# Altium PCB ADV7513.PcbDoc
Units mil, origin at the board's own origin, x right, y up, seen from the top; angles counter-clockwise.
Board outline 1436.53 x 1983.15 mil, 2 copper layers (Top Layer, Bottom Layer), stack 12.8 mil thick; 47 components, 79 nets, 332 pads, 138 vias.
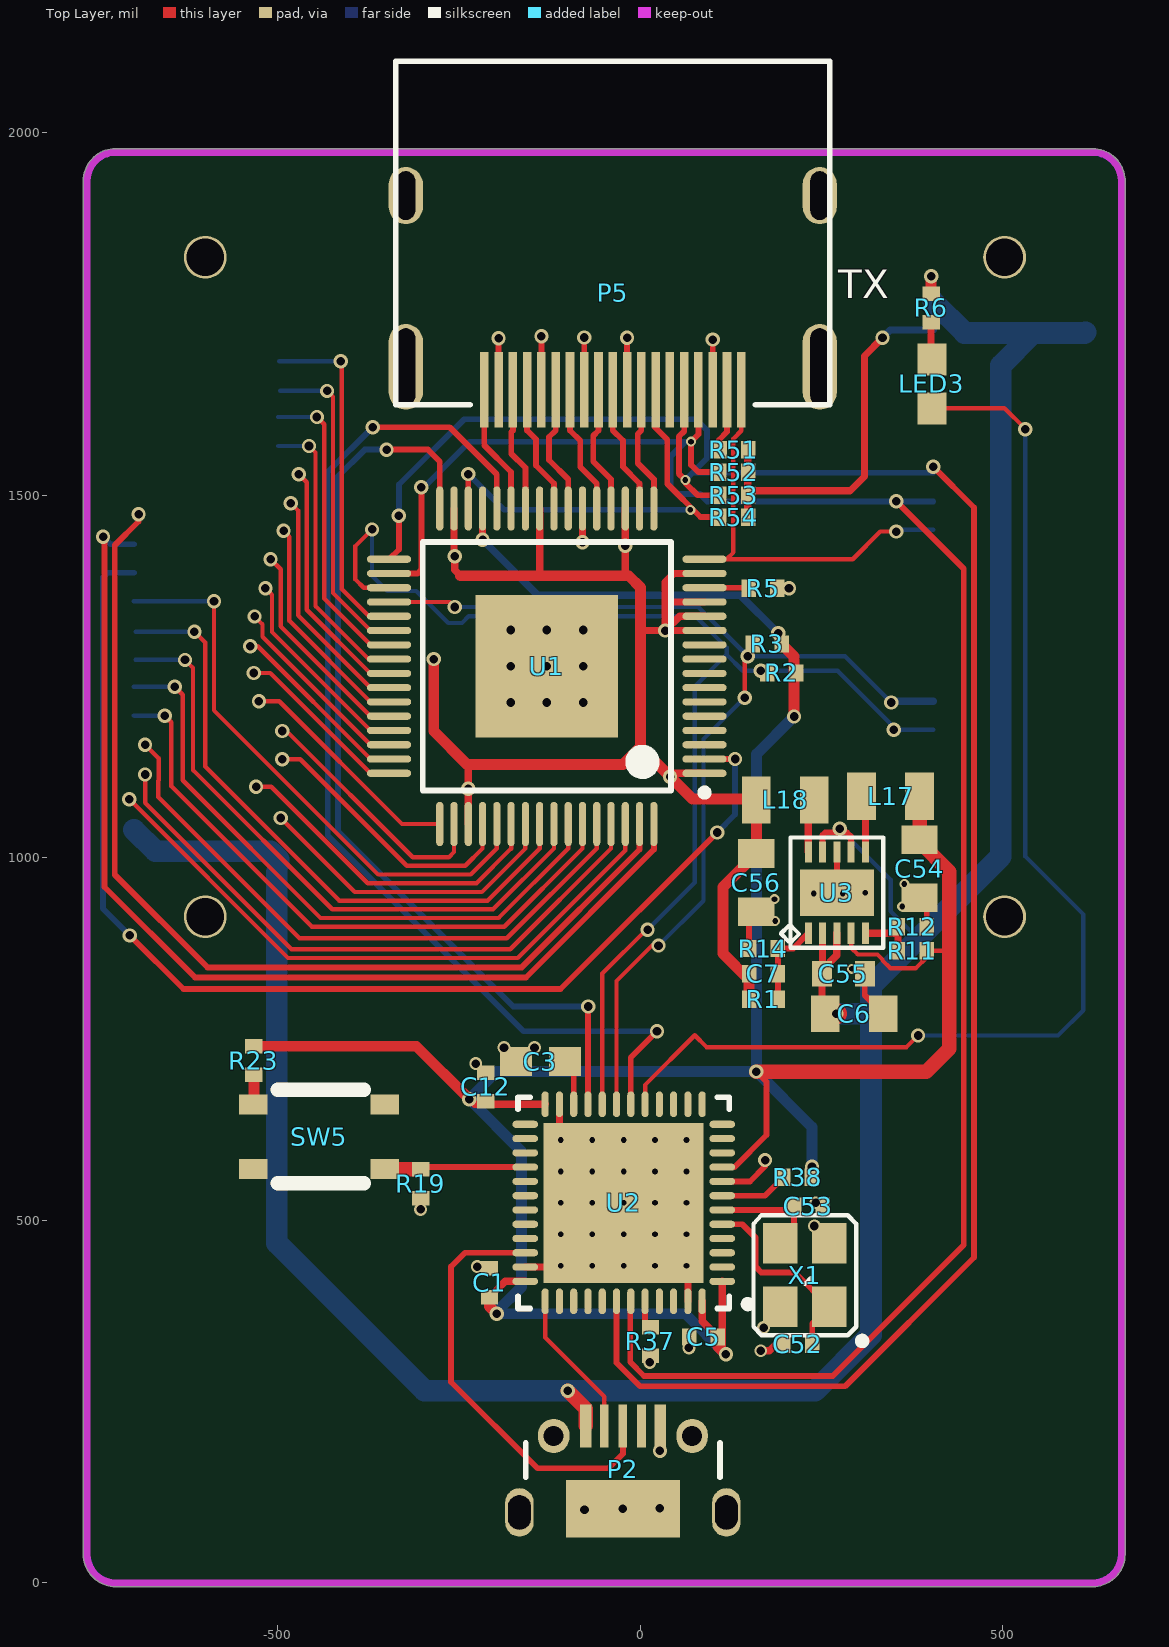
[diagram p0: Top Layer view]
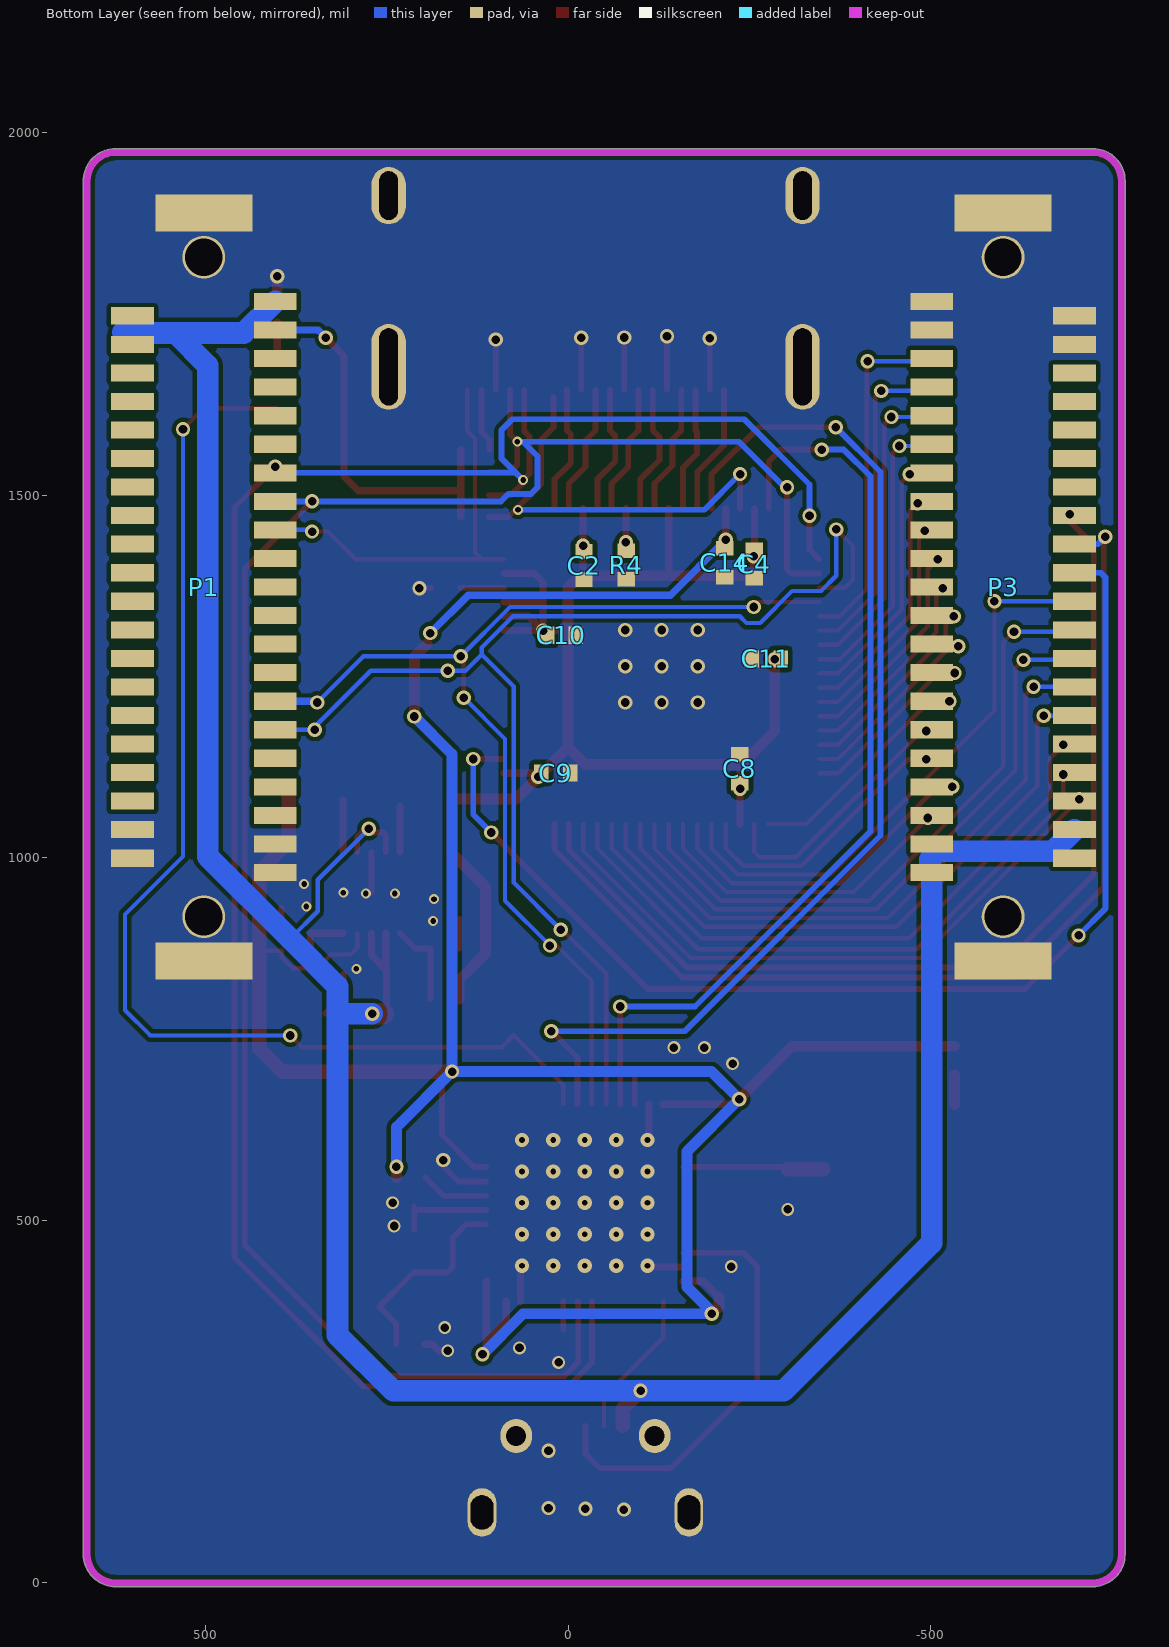
[diagram p1: Bottom Layer view, seen from below]

## Layer stack, top to bottom
Top Solder: solder mask 0.4, Solder Resist, Dk 3.5
Top Layer: signal copper 1.4
Dielectric 1: core 10, FR-4, Dk 4.2
Bottom Layer: signal copper 1.4
Bottom Solder: solder mask 0.4, Solder Resist, Dk 3.5

## Board outline
-768.11,39.37 ccw(c-723.72,39.37) -723.72,-5.02 ccw(c-723.72,0) -723.69,-5.01 624.04,-5.01 624.04,-5.02 ccw(c624.04,39.37) 668.43,39.37 ccw(c663.41,39.37) 668.43,39.4 668.43,1937.01 ccw(c663.41,1937.01) 668.16,1938.63 ccw(c624.04,1933.75) 624.04,1978.13 ccw(c624.04,1973.12) 623.97,1978.13 -723.72,1978.13 ccw(c-723.72,1933.75) -768.11,1933.75 ccw(c-763.09,1933.75) -768.11,1933.72

## Design rules (kind name [scope] priority, off if disabled: settings)
Clearance Clearance_1 [(InNamedPolygon('Bottom Layer-No Net')) vs Not InNet('GND')] p1: gap=15 ignorepadtopadclearanceinfootprint=FALSE except(0: Arc-Hole Track-Hole SMDPad-Hole THPad-Hole Via-Hole Fill-Hole Poly-Hole Region-Hole Text-Hole)
Clearance [All] p2: gap=6 ignorepadtopadclearanceinfootprint=FALSE except(0: Arc-Hole Track-Hole SMDPad-Hole THPad-Hole Via-Hole Fill-Hole Poly-Hole Region-Hole Text-Hole)
DiffPairsRouting [All] p1: maxlimit=10 minlimit=10 mostfreqgap=10 toplayer_minwidth=5.98 toplayer_maxwidth=15 toplayer_prefwidth=15 bottomlayer_minwidth=5.98 bottomlayer_maxwidth=15 bottomlayer_prefwidth=15 maxuncoupledlength=500
MinimumSolderMaskSliver [All] p1 off: minsoldermaskwidth=10
PlaneClearance [All] p1: clearance=10
PlaneConnect [All] p1: planeconnectstyle=Direct reliefexpansion=20 reliefentries=4 reliefconductorwidth=10 reliefairgap=10
PolygonConnect [All] p1: connectstyle=Direct reliefconductorwidth=10 reliefentries=4 polygonreliefangle="90 Angle" airgapwidth=10
RoomDefinition HDMI [InComponentClass('HDMI')] p1 off: confinementstyle=ConfineIn formatcopy=TRUE lockcomponents=FALSE outline 713,51.28 2211,51.28 2211,646.28 713,646.28
RoomDefinition interface [InComponentClass('interface')] p2 off: confinementstyle=ConfineIn formatcopy=TRUE lockcomponents=FALSE outline -6288,-2905.72 -4288,-2905.72 -4288,-1905.72 -6288,-1905.72
RoomDefinition MCU [InComponentClass('MCU')] p3 off: confinementstyle=ConfineIn formatcopy=TRUE lockcomponents=FALSE outline -1278,234.28 1067,234.28 1067,474.28 -1278,474.28
RoutingVias [All] p1: holewidth=12 width=20 viastyle="Through Hole" minholewidth=11.81 minwidth=19.68 maxholewidth=28 maxwidth=50
SilkToBoardRegionClearance [All] p1 off:
SilkToSilkClearance [All] p1 off: silktosilkclearance=10
SilkToSolderMaskClearance [IsPad] p1 off: minsilkscreentomaskgap=10 clearancetoexposedcopper=TRUE
SolderMaskExpansion [All] p1: expansion=4
Width [All] p1: maxlimit=60 minlimit=6 preferedwidth=6
23 further rules are at their usual default settings.

## Classes and differential pairs
component class MCU: C1 C3 C5 C6 C7 C12 C52 C53 C54 C55 C56 L17 L18 LED3 P2 R5 R6 R11 R12 R14 R19 R23 R28 R37 R38 SW5 U2 U3 X1
component class interface: P1 P3
component class HDMI: C2 C4 C8 C9 C10 C11 C14 P5 R2 R3 R4 R5 R51 R52 R53 R54 U1
net class TMDS: TMDS_CLK_N TMDS_CLK_P TMDS_D0_N TMDS_D0_P TMDS_D1_N TMDS_D1_P TMDS_D2_N TMDS_D2_P
differential pair TMDS_CLK: +TMDS_CLK_P -TMDS_CLK_N
differential pair TMDS_D0: +TMDS_D0_P -TMDS_D0_N
differential pair TMDS_D1: +TMDS_D1_P -TMDS_D1_N
differential pair TMDS_D2: +TMDS_D2_P -TMDS_D2_N

## Components (designator, comment, footprint, x,y, rotation, side; value= is the part's Value field where it differs from the comment)
C1 "Cap" 0402 -208,414.28 r270 top value=0.1uF
C2 "Cap" 0402 -22,1403 r90 bottom value=0.1uF
C3 "Cap" 0603 -138,719 r0 top value=4.7uF
C4 "Cap" 0402 -257,1405 r90 bottom value=0.1uF
C5 "Cap" 0402 87,339.28 r0 top value=0.1uF
C6 "10UF" 0805 295,785 r180 top
C7 "33pF" 0402 170,840 r180 top
C8 "Cap" 0402 -237,1123 r270 bottom value=0.1uF
C9 "Cap" 0402 17,1117 r0 bottom value=0.1uF
C10 "Cap" 0402 9,1307.28 r0 bottom value=0.1uF
C11 "Cap" 0402 -273,1274.28 r180 bottom value=0.1uF
C12 "Cap" 0402 -213,684.28 r270 top value=0.1uF
C14 "Cap" 0402 -216,1407 r90 bottom value=0.1uF
C52 "Cap" 0402 217,329.28 r0 top value=20pF
C53 "Cap" 0402 232,519.28 r180 top value=20pF
C54 "4.7UF" 0805 385,985 r90 top
C55 "33pF" 0603L 280,840 r180 top
C56 "4.7UF" 0805 160,966 r90 top
L17 "2.2UH" 0806 345,1085 r0 top
L18 "2.2uH" 0806 200,1080 r180 top
LED3 "LED0" 0603 402,1653.28 r90 top
P1 "DF9-41S" DF9-41S 502.36,1373.55 r270 bottom
P2 "SWD_MicroUSB" MICRO-YZX -24,-13.72 r0 top
P3 "DF9-41S" DF9-41S -600,1373.55 r90 bottom
P5 "HDMI" HDMI-A -38,1626 r180 top
R1 "300k" 0402 170,805 r180 top
R2 "10k" 0402 195,1255 r180 top value=0Ohm
R3 "10k" 0402 175,1295 r180 top value=0Ohm
R4 "10k" 0402 -80,1404 r270 bottom value=0Ohm
R5 "10k" 0402 169,1372 r0 top value=0Ohm
R6 "10k" 0402 401,1758.28 r90 top value=0Ohm
R11 "180k" 0402 375,872 r0 top
R12 "180k" 0402 375,905 r0 top
R14 "68k" 0402 170,875 r180 top
R19 "10k" 0402 -303,550.28 r90 top value=0Ohm
R23 "1k" 0402 -533,720.28 r90 top value=0Ohm
R37 "Res2" 0402 14,333.28 r270 top value=10k
R38 "Res2" 0402 217,559.28 r180 top value=10k
R51 "NC/1k" 0402 129,1563 r0 top value=0Ohm
R52 "NC" 0402 129,1532 r180 top value=0Ohm
R53 "NC" 0402 129,1500 r180 top value=0Ohm
R54 "NC" 0402 129,1470 r180 top value=0Ohm
SW5 "SW-PB" SW3x4 -443,615.28 r180 top
U1 "ADV7513" ADV7611 -129,1264.28 r180 top
U2 "STM32F401CCU6" STM-UFQFPN48_N -23,524.28 r180 top
U3 "Tps62410" DFN-10P-3X3 271,953 r90 top
X1 "24.000 KHz 3.2x2.5mm 8-10pf" OSCILLATOR-3.2X2.5 227,424.28 r90 top

## Footprints (in the part's own frame and the unit in brackets; to place one, negate y for a bottom-side part, rotate by r counter-clockwise, add the part's x,y. Pads: shape width x height; smd on the part's side, far side on the other; paste and mask are expansions set on the pad)
0402 [mil] "0402-RES"
  rect 20x24 smd: 1(-19.68,0) 2(20,0)
0603 [mil] "0603-RES"
  rect 44x40 smd: 1(-33.46,0) 2(34,0)
0603L [mm]
  rect 0.7x0.9 smd: 1(-0.75,0) 2(0.75,0)
  body extent -0.8,-0.4 0.8,0.4, height 0.8
0805 [mil]
  rect 39.37x50 smd: 1(-40,0) 2(40,0)
  body extent -50,-30 50,30, height 31
0806 [mm]
  rect 1x1.65 smd: 1(-1.016,0) 2(1.016,0)
  body extent -1,-0.8 1,0.8, height 0.5
ADV7611 [mm] "Thin QFP, 64-Leads, Body 10x10mm, Pitch 0.5mm, IPC High Density"
  rect 5x5 smd: 0(0,0)
  oval 1.55x0.25 smd: 1(-5.525,3.75) 2(-5.525,3.25) 3(-5.525,2.75) 4(-5.525,2.25) 5(-5.525,1.75) 6(-5.525,1.25) 7(-5.525,0.75) 8(-5.525,0.25) 9(-5.525,-0.25) 10(-5.525,-0.75) 11(-5.525,-1.25) 12(-5.525,-1.75) 13(-5.525,-2.25) 14(-5.525,-2.75) 15(-5.525,-3.25) 16(-5.525,-3.75) 33(5.525,-3.75) 34(5.525,-3.25) 35(5.525,-2.75) 36(5.525,-2.25) 37(5.525,-1.75) 38(5.525,-1.25) 39(5.525,-0.75) 40(5.525,-0.25) 41(5.525,0.25) 42(5.525,0.75) 43(5.525,1.25) 44(5.525,1.75) 45(5.525,2.25) 46(5.525,2.75) 47(5.525,3.25) 48(5.525,3.75)
  oval 0.25x1.55 smd: 17(-3.75,-5.525) 18(-3.25,-5.525) 19(-2.75,-5.525) 20(-2.25,-5.525) 21(-1.75,-5.525) 22(-1.25,-5.525) 23(-0.75,-5.525) 24(-0.25,-5.525) 25(0.25,-5.525) 26(0.75,-5.525) 27(1.25,-5.525) 28(1.75,-5.525) 29(2.25,-5.525) 30(2.75,-5.525) 31(3.25,-5.525) 32(3.75,-5.525) 49(3.75,5.525) 50(3.25,5.525) 51(2.75,5.525) 52(2.25,5.525) 53(1.75,5.525) 54(1.25,5.525) 55(0.75,5.525) 56(0.25,5.525) 57(-0.25,5.525) 58(-0.75,5.525) 59(-1.25,5.525) 60(-1.75,5.525) 61(-2.25,5.525) 62(-2.75,5.525) 63(-3.25,5.525) 64(-3.75,5.525)
  silkscreen extent -5.65,-4.35 4.35,4.55, body extent -5,-5 5,5, height 1.6
DF9-41S [mm]
  rect 1.3x3.4 smd: 0(-13.1,0) 0(13.1,0)
  round 1.5 hole 1.3: 0(-11.55,0) 0(11.55,0)
  rect 0.6x1.5 smd: 1(-10,2.5) 2(-9,2.5) 3(-8,2.5) 4(-7,2.5) 5(-6,2.5) 6(-5,2.5) 7(-4,2.5) 8(-3,2.5) 9(-2,2.5) 10(-1,2.5) 11(0,2.5) 12(1,2.5) 13(2,2.5) 14(3,2.5) 15(4,2.5) 16(5,2.5) 17(6,2.5) 18(7,2.5) 19(8,2.5) 20(9,2.5) 21(10,2.5) 22(9.5,-2.5) 23(8.5,-2.5) 24(7.5,-2.5) 25(6.5,-2.5) 26(5.5,-2.5) 27(4.5,-2.5) 28(3.5,-2.5) 29(2.5,-2.5) 30(1.5,-2.5) 31(0.5,-2.5) 32(-0.5,-2.5) 33(-1.5,-2.5) 34(-2.5,-2.5) 35(-3.5,-2.5) 36(-4.5,-2.5) 37(-5.5,-2.5) 38(-6.5,-2.5) 39(-7.5,-2.5) 40(-8.5,-2.5) 41(-9.5,-2.5)
DFN-10P-3X3 [mm]
  rect 0.75x0.25 smd mask+0.064: 1(-1.451,0.999) 2(-1.451,0.499) 3(-1.451,-0.001) 4(-1.451,-0.501) 5(-1.451,-1.001) 6(1.4,-1.001) 7(1.4,-0.501) 8(1.4,-0.001) 9(1.4,0.499) 10(1.4,0.999)
  rect 1.64x2.6 smd: 11(-0.025,-0.001)
  silkscreen extent -1.96,-1.63 1.9,1.95
HDMI-A [mm]
  oval 1.2x3 hole 0.65 slot 2.7 at 90 deg: 0(-7.25,-1.3) 0(7.25,-1.3)
  oval 1.2x2 hole 0.65 slot 1.7 at 90 deg: 0(-7.25,-7.3) 0(7.25,-7.3)
  rect 0.3x2.65 smd: 1(4.5,-0.5) 2(4,-0.5) 3(3.5,-0.5) 4(3,-0.5) 5(2.5,-0.5) 6(2,-0.5) 7(1.5,-0.5) 8(1,-0.5) 9(0.5,-0.5) 10(0,-0.5) 11(-0.5,-0.5) 12(-1,-0.5) 13(-1.5,-0.5) 14(-2,-0.5) 15(-2.5,-0.5) 16(-3,-0.5) 17(-3.5,-0.5) 18(-4,-0.5) 19(-4.5,-0.5)
  silkscreen extent -7.6,-12 7.6,0.03
MICRO-YZX [mm]
  rect 0.4x1.5 smd: 1(-1.3,5.85) 5(1.3,5.85)
  rect 0.3x1.5 smd: 2(-0.65,5.85) 3(0,5.85) 4(0.65,5.85)
  oval 1x1.7 hole 0.8 slot 1.2 at 90 deg: 5(-3.625,2.82) 5(3.625,2.82)
  oval 1.1x1.2 hole 0.7: 5(-2.425,5.5) 5(2.425,5.5)
  rect 4x2 smd: 5(0,2.95)
  silkscreen extent -3.4,4.05 3.4,5.25, body extent -4.02,0.33 3.98,5.93, height 2.6
OSCILLATOR-3.2X2.5 [mil] "OSCILLATOR-3.2X2.5"
  rect 56x48 smd: 1(-43.31,-33.46) 2(44,-33.46) 3(44,34) 4(-43.31,34)
  silkscreen extent -95,-83 83,71
STM-UFQFPN48_N [mm] "QFN, 48-Leads, Body 7.1x7.1mm, Pitch 0.5mm, Thermal Pad 5.6x5.6mm, IPC Medium Density"
  oval 0.9x0.25 smd: 1(-3.45,2.75) 2(-3.45,2.25) 3(-3.45,1.75) 4(-3.45,1.25) 5(-3.45,0.75) 6(-3.45,0.25) 7(-3.45,-0.25) 8(-3.45,-0.75) 9(-3.45,-1.25) 10(-3.45,-1.75) 11(-3.45,-2.25) 12(-3.45,-2.75) 25(3.45,-2.75) 26(3.45,-2.25) 27(3.45,-1.75) 28(3.45,-1.25) 29(3.45,-0.75) 30(3.45,-0.25) 31(3.45,0.25) 32(3.45,0.75) 33(3.45,1.25) 34(3.45,1.75) 35(3.45,2.25) 36(3.45,2.75)
  oval 0.25x0.9 smd: 13(-2.75,-3.45) 14(-2.25,-3.45) 15(-1.75,-3.45) 16(-1.25,-3.45) 17(-0.75,-3.45) 18(-0.25,-3.45) 19(0.25,-3.45) 20(0.75,-3.45) 21(1.25,-3.45) 22(1.75,-3.45) 23(2.25,-3.45) 24(2.75,-3.45) 37(2.75,3.45) 38(2.25,3.45) 39(1.75,3.45) 40(1.25,3.45) 41(0.75,3.45) 42(0.25,3.45) 43(-0.25,3.45) 44(-0.75,3.45) 45(-1.25,3.45) 46(-1.75,3.45) 47(-2.25,3.45) 48(-2.75,3.45)
  rect 5.6x5.6 smd: 49(0,0)
  silkscreen extent -4.48,-3.7 3.7,3.7, body extent -3.55,-3.55 3.55,3.55, height 0.6
SW3x4 [mm]
  rect 1x0.7 smd: 1(-2.3,1.125) 2(2.3,-1.125) 3(2.3,1.125) 4(-2.3,-1.125)
  silkscreen extent -1.58,-1.65 1.45,1.63, body extent -2,-1.5 2,1.5, height 2.6

## Part data
C1 C2 C3 C4 C5 C8 C9 C10 C11 C12 C14 C52 C53: "Capacitor", LatestRevisionDate=17-Jul-2002, LatestRevisionNote="Re-released for DXP Platform.", PackageDescription="Radial Cap, Thru-Hole; 2 Leads; 0.3 in Pin Spacing", PackageReference=RAD-0.3, Published=8-Jun-2000, Publisher="Altium Limited"
C6 C7 C54 C55 C56: library part CAP/0402, 1st Part Field=0402
L17 L18: library part L/2.5*2.0
LED3: "Typical INFRARED GaAs LED", LatestRevisionDate=08-Jul-2005, LatestRevisionNote="Mech Layer 1 removed.", PackageDescription="LED; 2 Leads", PackageReference=LED-0, Published=8-Jun-2000, Publisher="Altium Limited"
P2: "Connector SMD USB Micro Type B middle mount", Manufacturer 1="Molex Inc", Package / Case=SMD, Supplier Part Number 1=WM17142CT-ND, SCDType=undef, Supplier 1=Digi-Key
R1 R11 R12 R14: library part RES/0402_3
R2 R3 R4 R5 R6 R19 R23 R51 R52 R53 R54: library part Res2, "Resistor", LatestRevisionDate=17-Jul-2002, LatestRevisionNote="Re-released for DXP Platform.", PackageDescription="Axial Device, Thru-Hole; 2 Leads; 0.4 in Pin Spacing", PackageReference=AXIAL-0.4, Published=8-Jun-2000, Publisher="Altium Limited"
R37 R38: "Resistor", LatestRevisionDate=17-Jul-2002, LatestRevisionNote="Re-released for DXP Platform.", PackageDescription="Axial Device, Thru-Hole; 2 Leads; 0.4 in Pin Spacing", PackageReference=AXIAL-0.4, Published=8-Jun-2000, Publisher="Altium Limited"
SW5: "Switch", LatestRevisionDate=17-Jul-2002, LatestRevisionNote="Re-released for DXP Platform.", PackageDescription="Switch; 2 Leads", PackageReference=SPST-2, Published=24-Mar-1999, Publisher="Altium Limited"
U2: "ARM Cortex-M4 32-bit MCU+FPU, 105 DMIPS, 256 kB Flash, 64 kB Internal RAM, 36 I/Os, 48-pin UFQFPN, -40 to 85 degC, Tray", I/Os (High Current)=36, Manufacturer=STMicroelectronics, Operating Frequency(F) (Processor speed) (MHz)=84, Supplier Part Number 1=19X6217, Supply Voltage(Vcc) max (V)=3.6, Supply Voltage(Vcc) min (V)=1.8, ComponentLink1Description="Manufacturer URL", ComponentLink1URL=http://www.st.com/web/en/home.html, ComponentLink2Description=Datasheet, ComponentLink2URL=http://www.st.com/st-web-ui/static/active/en/resource/technical/document/data_brief/DM00071938.pdf, ComponentLink3Description="Package Specification", ComponentLink3URL=http://www.st.com/st-web-ui/static/active/en/resource/technical/document/data_brief/DM00071938.pdf, Core="ARM Cortex-M4", DatasheetVersion="Rev. 1", FLASH Size (Prog) (kB)=256, Internal RAM Size (kB)=64, Mounting Technology="Surface Mount", PackageDescription="48-Pin Ultra Thin Fine Pitch Quad Flat No-Lead, 7 x 7 x 0.6 mm Body, 0.5 mm Pitch, Exposed Pad", PackageReference=UFQFPN48, PackageVersion="Rev. 1, 04/2013", Packing=Tray, PartNumber=STM32F401CCU6, Supplier 1=Newark, Supplier 2=Mouser, Supplier Part Number 2=511-STM32F401CCU6
X1: library part OSCILLATOR-3.2X2.5, "Crystal Oscillator in 3.2x2.5 SMD"

## Via types
v1: diameter 19.68, hole 11.81, Top Layer to Bottom Layer, 91 vias
v2: diameter 19.68, hole 7.87, Top Layer to Bottom Layer, 25 vias
v3: diameter 13.78, hole 7.87, Top Layer to Bottom Layer, 11 vias
v4: diameter 17.72, hole 11.81, Top Layer to Bottom Layer, 11 vias

## Nets (pads, with @x,y where several pads share a name; then routed paths per layer and width w, separated by ;. In a path a pad name is that pad's centre, name@x,y a point inside that pad or via, vN(x,y) a via of type N, cw(c..) or ccw(c..) an arc to the next point about the centre after c; other vN are vias at no path point)
1.8D: C2.2 C4.2 C7.2 C8.2 C9.2 C10.2 C11.2 C56.2 L18.2 R1.2 U1.1 U1.11 U1.12 U1.13 U1.15 U1.19 U1.25 U1.31 U1.51 | length 2110.3
  Top Layer w10: U1.31 -256.95,1416.95 v1(-256,1416) -256,1397 -248,1389 ; U1.51 v1(-237.27,1095.27) -237.27,1127.27 ; -138.84,1390.84 U1.25 ; -20.73,1393.73 v1(-20.73,1430.27) U1.19 ; 2.51,1313.49 v1(34.49,1313.49) ; v1@45.64,1116.64 U1.1 ; U1.11 v1(34.49,1313.49) ; U1.12 54.17,1333.17 v1(34.49,1313.49) ; U1.13 38.86,1352.86 34.49,1348.49 ; U1.15 46.23,1392.23 34.49,1380.49 34.49,1348.49 ; v1(34.49,1313.49) 34.49,1348.49
  Top Layer w15: v1(-285,1274.12) -285,1175 -239,1129 -24,1129 0,1153 ; -248,1389 -16,1389 0,1373 0,1153 ; R1.2 150,832 114,868 114,960 C56.2 L18.2 ; L18.2@155,1081.28 71.72,1081.28 v1(41,1112) 0,1153
3.3D: C1.2 C5.2 C12.2 C14.2 C54.2 L17.2 R2.1 R3.1 R11.2 R23.2 R38.1 U1.29 U2.1 U2.9 U2.24 U2.36 U2.48 U3.4 | length 4087.3
  Top Layer w6: U3.4 290.72,876 300,866.72 327.03,866.72 334,859.75 334,858.59 344.59,848 380,848 395,863 R11.2 420,872
  Top Layer w8: U2.9 129.76,573.49 174,617.73 174,691.28 v1(160,705.28)
  Top Layer w10: v1(-236,667.28) -228.83,660.1 U2.24 ; v1(-217.58,1438.58) U1.29 ; C1.2 -186.27,416.01 U2.36 ; U2.48 85.27,361.01 C5.2 ; v1@112.83,320.45 U2.1
  Top Layer w15: R23.2 -309,740.28 v1(-236,667.28) ; C1.2 -208,381.28 v1(-198,371.28) ; C5.2 107,326.28 112.83,320.45 v1(118,315.28) ; R3.1 212,1277.69 v1(212,1195) ; R38.1 v1(236.69,573.96)
  Top Layer w20: v1(160,705.28) 394.28,705.28 426,737 426,981 385,1022 L17.2
  Bottom Layer w10: v1(-217.58,1438.58) -141.31,1362.31 137.69,1362.31 v1(190,1310)
  Bottom Layer w15: v1(118,315.28) 62,371.28 v1(-198,371.28) -198,374.28 -164,408.28 -164,595.28 v1(-236,667.28) -198,705.28 v1(160,705.28) ; v1(212,1195) 160,1143 v1(160,705.28) ; v1(236.69,573.96) 236.69,628.59 v1(160,705.28)
5V: C6.2 C55.2 P1.1 P1.2 P1.40 P1.41 P2.1 P3.1 P3.2 P3.40 P3.41 R51.2 R52.1 R53.1 R54.1 U3.2 U3.3 U3.7 U3.9 | length 4493.5
  Top Layer w8: U3.9 251.35,1031.35 255,1035 v1@275,1035 ; v1(275,1040) v1@275,1035 ; U3.7 290.72,1029.28 285,1035 v1@275,1035
  Top Layer w10: R54.1@148,1470.31 R53.1@148,1506.28 ; R51.2@148,1563 R53.1@148,1506.28 ; U3.2 C55.2@251.35,845.88 ; C6.2 250.47,789.53 250.47,845 C55.2@251.35,845.88 ; U3.3 271.03,865.56 C55.2@251.35,845.88 ; v1(334,1717.28) 309,1692.28 309,1525.96 289,1505.96 288.69,1506.28 R53.1@148,1506.28
  Top Layer w20: v1(-100,265) -75.18,240.18 P2.1
  Top Layer w30: C6.2 v1(270,785)
  Bottom Layer w6: v1(275,1040) 345.11,969.89 345.11,926.42 382.06,889.47 382.06,886.94
  Bottom Layer w10: v1(334,1717.28) 344.61,1727.88 P1.2
  Bottom Layer w30: P3.40 -668.52,1009 -510,1009 -499,998 -499,992 ; P3.1 -501.57,469 -297.57,265 v1(-100,265) 241,265 318,342 318,785 ; v1(270,785) 318,785 ; P1.1 447.19,1724 542,1724 ; 614,1725 613,1724 542,1724 ; 318,785 318,822.88 382.06,886.94 497,1001.88 497,1679 542,1724
GND: C1.1 C2.1 C3.1 C4.1 C5.1 C6.1 C8.1 C9.1 C10.1 C11.1 C12.1 C14.1 C52.1 C53.1 C54.1 C55.1 C56.1 P1.0 P1.20 P1.21 P1.22 P1.23 P2.5 P3.0 P3.20 P3.21 P3.22 P3.23 P5.0 P5.2 P5.5 P5.8 P5.11 P5.17 R4.2 R5.2 R6.2 R12.2 R14.2 R19.1 R37.2 U1.0 U2.8 U2.23 U2.35 U2.47 U2.49 U3.8 U3.11 X1.2 X1.4 | length 840.1
  Top Layer w8: P5.2 v1(-195.48,1716.48) ; P5.5 v1(-136.43,1719.43) ; P5.8 v1(-77.37,1717.63) ; P5.11 v1(-18.31,1717.31) ; P5.17 v1(99.8,1714.8) ; U2.8 151.21,553.8 172,574.59 v1(172,583.28) ; R14.2 C56.1@150,916 ; R5.2 v1(205,1372) ; U3.11 U3.8 ; C55.1 309.53,810.47 C6.1 ; R12.2 C54.1@395,932
  Top Layer w10: U2.35 U2.49@-111.58,435.69 ; U2.49@-111.58,612.86 U2.23 ; U2.47 U2.49@65.58,435.69 ; v4(166,320.28) 178,320.28 187,329.28 C52.1
  Top Layer w15: R6.2 v1(401,1802.28)
  other v1: -77,101.28 -24,102.42 27,103.28 27,182.28 -179,1214.28 -129,1214.28 -79,1214.28 -179,1264.28 -129,1264.28 -79,1264.28 -179,1314.28 -129,1314.28 -79,1314.28
  other v2: -109.61,437.66 -66.31,437.66 -23,437.66 20.31,437.66 63.61,437.66 -109.61,480.97 -66.31,480.97 -23,480.97 20.31,480.97 63.61,480.97 -109.61,524.28 -66.31,524.28 -23,524.28 20.31,524.28 63.61,524.28 -109.61,567.58 -66.31,567.58 -23,567.58 20.31,567.58 63.61,567.58 -109.61,610.89 -66.31,610.89 -23,610.89 20.31,610.89 63.61,610.89
  other v3: 292,847 186,913 361,933 185,943 239,951 279,951 310,952 364,964
  other v4: 13,304.28 67,324.28 170,352.28 -225,436.28 240,492.28 -303,515.28 242,524.28 -227,716.28 -188,738.28 -146,738.28
KEY2: U2.25
KEY3: U2.26
KEY4: U2.27
KEY5: R19.2 SW5.1 U2.28 | length 204.8
  Top Layer w8: R19.2@-314,571.28 -311.79,573.49 U2.28
  Top Layer w20: SW5.1@-351.74,570.28 R19.2
LED: LED3.1 U2.17 | length 1662.8
  Top Layer w6: U2.17 6.53,686.8 75,755.28 91.28,739 367,739 v1(383,755) ; LED3.1@402,1620.28 502,1620.28 v1(531,1591.28)
  Bottom Layer w6: v1(383,755) 576,755 611,790 611,921.95 531,1001.95 v1(531,1591.28)
NetC3_2: C3.2 U2.22 | length 47.1
  Top Layer w8: U2.22 C3.2@-91.9,707.17
NetC7_1: C7.1 R1.1 R14.1 U3.1 | length 120.6
  Top Layer w8: R1.1 C7.1 R14.1 210.78,875 U3.1
NetC52_2: C52.2 U2.5 X1.1 | length 279.7
  Top Layer w8: U2.5 140.53,494.75 159,476.28 159,436.13 166.86,428.28 213.16,428.28 X1.1 237,357.5 C52.2
NetC53_2: C53.2 U2.6 X1.3 | length 126.3
  Top Layer w8: U2.6 C53.2@207.16,514.43 ; X1.3@212,487.28 C53.2
NetL17_1: L17.1 U3.6 | length 71.5
  Top Layer w10: U3.6 L17.1@310.4,1079.6
NetL18_1: L18.1 U3.10 | length 63.5
  Top Layer w10: U3.10 L18.1@231.66,1071.66
NetLED3_2: LED3.2 R6.1 | length 50.3
  Top Layer w10: LED3.2@401,1688.28 R6.1
NetP1_7: P1.7 P5.15 R53.2 U1.33 U2.42 | length 2966.4
  Top Layer w8: U1.33 -333,1425.43 v1(-333,1472) ; U2.42 -33,388.29 -33,303.81 -0.61,271.42 282.42,271.42 460,449 460,1483.28 v1(403.94,1539.34) ; P5.15 60.43,1588.31 53.11,1581 53.11,1529.89 v3(62,1521) 62,1517 79,1500 R53.2
  Bottom Layer w8: v1(-333,1472) -333,1515 -243,1605 76.89,1605 92,1589.89 92,1551 72.03,1531.03 ; v3(62,1521) 72.03,1531.03 ; v1(403.94,1539.34) P1.7 72.03,1531.03
NetP1_8: P1.8 P5.16 R52.2 U1.34 U2.43 | length 2834.6
  Top Layer w8: U1.34 -307.23,1392.23 -302,1397.46 v1(-302,1511) ; U2.43 -14,387.61 -14,304.61 5.19,285.42 265.42,285.42 446,466 446,1398.66 v1(353,1491.66) ; P5.16 80.11,1584.11 v3(70,1574) 70,1542 80,1532 R52.2
  Bottom Layer w8: v1@-294.58,1515 -235.58,1574 62,1574 ; v3@70,1576 v3(70,1574) 62,1574 ; P1.8 v1(353,1491.66) 92.34,1491.66 82,1502 51,1502 42,1511 42,1554 62,1574
NetP1_9: P1.9 P5.19 U1.16 | length 574.3
  Top Layer w6: U1.16 U1.16@118.91,1411.91 ; P5.19 139.17,1588.89 128.31,1578.04 128.31,1421.31 U1.16@118.91,1411.91 ; v1(353,1450) 331,1450 292.91,1411.91 U1.16@118.91,1411.91
  Bottom Layer w6: v1(353,1450) 355.29,1452.29 P1.9
NetP1_15: P1.15 R3.2 U1.36 U2.19 | length 1501
  Top Layer w6: U1.36 -262.86,1352.86 v1(-256,1346) ; U2.19 -32.84,830.16 16,879 v1(25,879) ; v1(144,1221) v1@144,1274
  Bottom Layer w6: v1(-256,1346) 80,1346 v1(148,1278) 282.28,1278 v1(346,1214.28) ; v1(25,879) 87,941 87,1164 v1(144,1221)
  Bottom Layer w10: v1(346,1214.28) 347.8,1216.07 P1.15
NetP1_16: P1.16 R2.2 U1.35 U2.20 | length 1764.5
  Top Layer w6: v1(-370,1453) -393,1430 -393,1384 -381.54,1372.54 U1.35 ; U2.20 -52.53,840.47 9,902 v1(10,901)
  Bottom Layer w6: v1(-370,1453) -370,1389 -349,1368 -309,1368 -265,1324 -246,1324 -236.88,1333.12 75.91,1333.12 119,1290.03 119,1280.35 ; v1(10,901) 75,966 75,1236.35 119,1280.35 ; P1.16 v1(349.3,1176.7) 349.3,1180.7 272,1258 v1(166,1258) 141.35,1258 119,1280.35
NetP3_3: P3.3 U1.55 | length 438.3
  Top Layer w6: v1(-496,1055) -394,953 -218.54,953 -158.53,1013.01 U1.55
NetP3_4: P3.4 U1.54 | length 460.6
  Top Layer w6: v1(-530,1098) -509,1098 -376,965 -226,965 -178.21,1012.79 U1.54
NetP3_5: P3.5 U1.52 | length 381
  Top Layer w6: v1(-494,1136) -469,1136 -322,989 -241.59,989 -217.58,1013.01 U1.52
NetP3_6: P3.6 U1.50 | length 350.7
  Top Layer w6: v1(-494,1175) -488,1175 -314,1001 -264,1001 -256.95,1008.05 U1.50
NetP3_7: P3.7 U1.49 | length 319.5
  Top Layer w6: v1(-526,1216) -498,1216 -328.76,1046.76 U1.49
NetP3_8: P3.8 U1.48 | length 243.8
  Top Layer w6: v1(-533,1255) -510.47,1255 -372.11,1116.64 U1.48
NetP3_9: P3.9 U1.47 | length 256
  Top Layer w6: v1(-538,1292) -527.79,1292 -372.11,1136.32 U1.47
NetP3_10: P3.10 U1.46 | length 268.8
  Top Layer w6: v1(-532,1333) -521,1322 -521,1304.9 -372.11,1156.01 U1.46
NetP3_11: P3.11 U1.45 | length 281.9
  Top Layer w6: v1(-517,1372) -508,1363 -508,1311.58 -372.11,1175.69 U1.45
NetP3_12: P3.12 U1.44 | length 299.3
  Top Layer w6: v1(-510,1412) -496,1398 -496,1319.27 -372.11,1195.38 U1.44
NetP3_13: P3.13 U1.43 | length 311.2
  Top Layer w6: v1(-492,1451) -484,1443 -484,1326.95 -372.11,1215.06 U1.43
NetP3_14: P3.14 U1.42 | length 325.4
  Top Layer w6: v1(-482,1489) -472,1479 -472,1334.64 -372.11,1234.75 U1.42
NetP3_15: P3.15 U1.41 | length 341.2
  Top Layer w6: v1(-471,1529) -460,1518 -460,1342.21 -372.23,1254.43 U1.41
NetP3_16: P3.16 U1.40 | length 398.5
  Top Layer w6: v1(-457,1568) -448,1559 -448,1347.18 -374.94,1274.12 U1.40
  Bottom Layer w6: P3.16@-499.17,1568 v1(-457,1568)
NetP3_17: P3.17 U1.39 | length 424.2
  Top Layer w6: v1(-446,1608) -436,1598 -436,1357.69 -372.11,1293.8 U1.39
  Bottom Layer w6: P3.17@-499.8,1608 v1(-446,1608)
NetP3_18: P3.18 U1.38 | length 445.3
  Top Layer w6: v1(-432,1644) -423.84,1635.84 -423.84,1365.22 -372.11,1313.49 U1.38
  Bottom Layer w6: P3.18@-496.43,1644 v1(-432,1644)
NetP3_19: P3.19 U1.37 | length 480.6
  Top Layer w6: v1(-413,1685) -411.84,1683.84 -411.84,1370.84 -374.17,1333.17 U1.37
  Bottom Layer w6: P3.19@-498.06,1685 v1(-413,1685)
NetP3_29: P3.29 U1.63 | length 1390
  Top Layer w8: v1(-692,1474) -692,1463.94 -724.84,1431.1 -724.84,976.84 -597,849 -163.62,849 -1.05,1011.57 U1.63
NetP3_30: P3.30 U1.64 | length 1448.5
  Top Layer w8: v1(-741,1443) -738.84,1440.84 -738.84,959.84 -614,835 -157.82,835 18.64,1011.45 U1.64
  Bottom Layer w8: v1(-741,1443) -730.61,1432.61 P3.30
NetP3_31: P3.31 U1.2 | length 1638.3
  Top Layer w8: v1(-704,893) -630,819 -110,819 v1(106,1035) ; U1.2 v1(130.68,1136.32)
  Bottom Layer w8: v1(-704,893) -741,930 -741,1387 -734.76,1393.24 P3.31 ; v1(106,1035) 130.68,1059.68 v1(130.68,1136.32)
NetP3_32: P3.32 U1.53 | length 793.6
  Top Layer w6: v1(-588,1354) -588,1203.35 -361.65,977 -233.91,977 -197.9,1013.01 U1.53
  Bottom Layer w6: P3.32 -698.29,1354 v1(-588,1354)
NetP3_33: P3.33 U1.56 | length 874.5
  Top Layer w6: v1(-615,1312) -600,1297 -600,1126 -415,941 -210.85,941 -138.84,1013.01 U1.56
  Bottom Layer w6: P3.33@-695.93,1312 v1(-615,1312)
NetP3_34: P3.34 U1.57 | length 870.8
  Top Layer w6: v1(-628,1273) -617,1262 -617,1121 -425,929 -203.17,929 -119.16,1013.01 U1.57
  Bottom Layer w6: P3.34@-696.3,1273 v1(-628,1273)
NetP3_35: P3.35 U1.58 | length 873.8
  Top Layer w6: v1(-642,1236) -631,1225 -631,1107 -441,917 -195.48,917 -99.47,1013.01 U1.58
  Bottom Layer w6: P3.35 -698.18,1236 v1(-642,1236)
NetP3_36: P3.36 U1.59 | length 869.4
  Top Layer w6: v1(-656,1196) -647,1187 -647,1099 -453,905 -187.8,905 -79.79,1013.01 U1.59
  Bottom Layer w6: P3.36 -698.04,1196 v1(-656,1196)
NetP3_37: P3.37 U1.60 | length 850.9
  Top Layer w6: v1(-683,1156) -664.16,1137.16 -664.16,1107.2 -665,1106.35 -665,1084 -470,889 -184.11,889 -60.1,1013.01 U1.60
NetP3_38: P3.38 U1.61 | length 856.6
  Top Layer w6: v1(-683,1115) -683,1076 -481,874 -179.43,874 -40.42,1013.01 U1.61
NetP3_39: P3.39 U1.62 | length 872.9
  Top Layer w6: v1(-705,1081) -486,862 -169,862 -20.73,1010.27 U1.62
NetP5_13: P5.13 R54.2 U1.30 | length 592.1
  Top Layer w8: U1.30 v1(-237.27,1529.27) ; P5.13@20.24,1635.94 20.24,1593.98 37.11,1577.11 37.11,1515.89 83,1470 R54.2
  Bottom Layer w8: v1(-237.27,1529.27) -188,1480 v3(69,1480)
NetP5_18: P5.18 R51.1 | length 87.3
  Top Layer w8: R51.1@108.31,1563 108.31,1576.43 119.48,1587.59 P5.18
NetR4_1: R4.1 U1.22 | length 46.6
  Top Layer w10: v1(-79.79,1435.21) U1.22
NetR5_1: R5.1 U1.14 | length 60.3
  Top Layer w8: U1.14 R5.1@148.77,1372.54
NetR11_1: R11.1 R12.1 U3.5 | length 60.8
  Top Layer w10: U3.5 355.31,895.88 R11.1@355.31,880
NetR23_1: R23.1 SW5.2 | length 40.5
  Top Layer w15: SW5.2@-533,660.12 R23.1
NetR37_1: R37.1 U2.44 | length 39
  Top Layer w8: R37.1@6.53,349.43 U2.44
NetR38_2: R38.2 U2.7 | length 94.6
  Top Layer w8: U2.7 171.84,534.12 R38.2
NetU1_4: U1.4
NetU1_5: U1.5
NetU1_9: U1.9
NetU1_10: U1.10
NetU1_28: U1.28 U2.18 | length 1515.6
  Top Layer w8: v1(-369,1594) -263,1594 -197.9,1528.9 U1.28 ; U2.18 -13.16,724.84 v1(23,761)
  Bottom Layer w8: v1(-369,1594) -431,1532 -431,1031 -161,761 v1(23,761)
NetU1_32: U1.32 U2.21 | length 1296.8
  Top Layer w8: v1(-350,1563) -293,1563 -276.64,1546.64 U1.32 ; U2.21 -72,660.32 v1(-72,795)
  Bottom Layer w8: v1(-350,1563) -380.2,1563 -417,1526.2 -417,1036.8 -175.2,795 v1(-72,795)
NetU2_29: U2.29
NetU2_41: U2.41
PA9: U2.30
PA10: U2.31
PA11: U2.32
PA12: U2.33
PA13: P2.3 U2.34 | length 602
  Top Layer w8: U2.34 -241.9,455.38 -261,436.28 -261,277.28 -142,158.28 -44,158.28 -24,178.28 P2.3
PA14: P2.2 U2.37 | length 205.7
  Top Layer w6: U2.37 -131.27,338.54 -49.59,256.87 P2.2
TMDS_CLK_N: P5.12 U1.17 | length 175.2
  Top Layer w8: P5.12 1.37,1589.52 -3.64,1584.51 -3.64,1544.36 18.64,1522.08 U1.17
TMDS_CLK_P: P5.10 U1.18 | length 179.2
  Top Layer w8: P5.10 -38,1589.52 -24,1575.52 -24,1539.26 -1.05,1516.31 U1.18
TMDS_D0_N: P5.9 U1.20 | length 177.1
  Top Layer w8: P5.9 -57.69,1589.52 -65,1582.2 -65,1546.66 -40.42,1522.08 U1.20
TMDS_D0_P: P5.7 U1.21 | length 179.2
  Top Layer w8: P5.7 -97.06,1589.52 -83,1575.46 -83,1539.21 -60.1,1516.31 U1.21
TMDS_D1_N: P5.6 U1.23 | length 178.7
  Top Layer w8: P5.6 -116.74,1589.52 -126,1580.26 -126,1548.61 -99.47,1522.08 U1.23
TMDS_D1_P: P5.4 U1.24 | length 179.2
  Top Layer w8: P5.4 -156.11,1589.52 -144,1577.41 -144,1541.15 -119.16,1516.31 U1.24
TMDS_D2_N: P5.3 U1.26 | length 172.8
  Top Layer w8: P5.3 -175.8,1589.52 -177.91,1587.4 -177.91,1557.37 -158.53,1537.98 U1.26
TMDS_D2_P: P5.1 U1.27 | length 179.2
  Top Layer w8: P5.1 -215.17,1569.17 -178.21,1532.21 U1.27
pads on no net: P1.3 P1.4 P1.5 P1.6 P1.10 P1.11 P1.12 P1.13 P1.14 P1.17 P1.18 P1.19 P1.24 P1.25 P1.26 P1.27 P1.28 P1.29 P1.30 P1.31 P1.32 P1.33 P1.34 P1.35 P1.36 P1.37 P1.38 P1.39 P2.4 P3.24 P3.25 P3.26 P3.27 P3.28 P5.14 SW5.3 SW5.4 U1.3 U1.6 U1.7 U1.8 U2.2 U2.3 U2.4 U2.10 U2.11 U2.12 U2.13 U2.14 U2.15 U2.16 U2.38 U2.39 U2.40 U2.45 U2.46

## Polygon pours and split planes (outlines as drawn)
GND on Bottom Layer "GND_L02_P000" (solid, remove dead copper, pour order 0): -786,2003.28 -783,2000.28 694,2000.28 694,-18.72 674,-38.72 653,-17.72 -801,-17.72

## Keep-outs
Keep-Out Layer:
  lines w10: 663.41,1933.75 ccw(c624.04,1933.75) 624.04,1973.12 -723.72,1973.12 ccw(c-723.72,1933.75) -763.09,1933.75 -763.09,39.37 ccw(c-723.72,39.37) -723.72,0 624.04,0 ccw(c624.04,39.37) 663.41,39.37 663.41,1937.01

## Silkscreen, mask and mechanical layers (free items; w line width, h text height)
Top Overlay:
  text "TX" at 273,1772 h39.37